# Altium PCB host_board.PcbDoc (part 3 of 3)
Units mm, origin at the board's own origin, x right, y up, seen from the top; angles counter-clockwise.
Board outline 82.44 x 55.58 mm, 4 copper layers (Top Layer, GND, Power, Bottom Layer), stack 1.594 mm thick; 220 components, 249 nets, 1076 pads, 228 vias.
Unrouted connection lines stored in the file: 688.
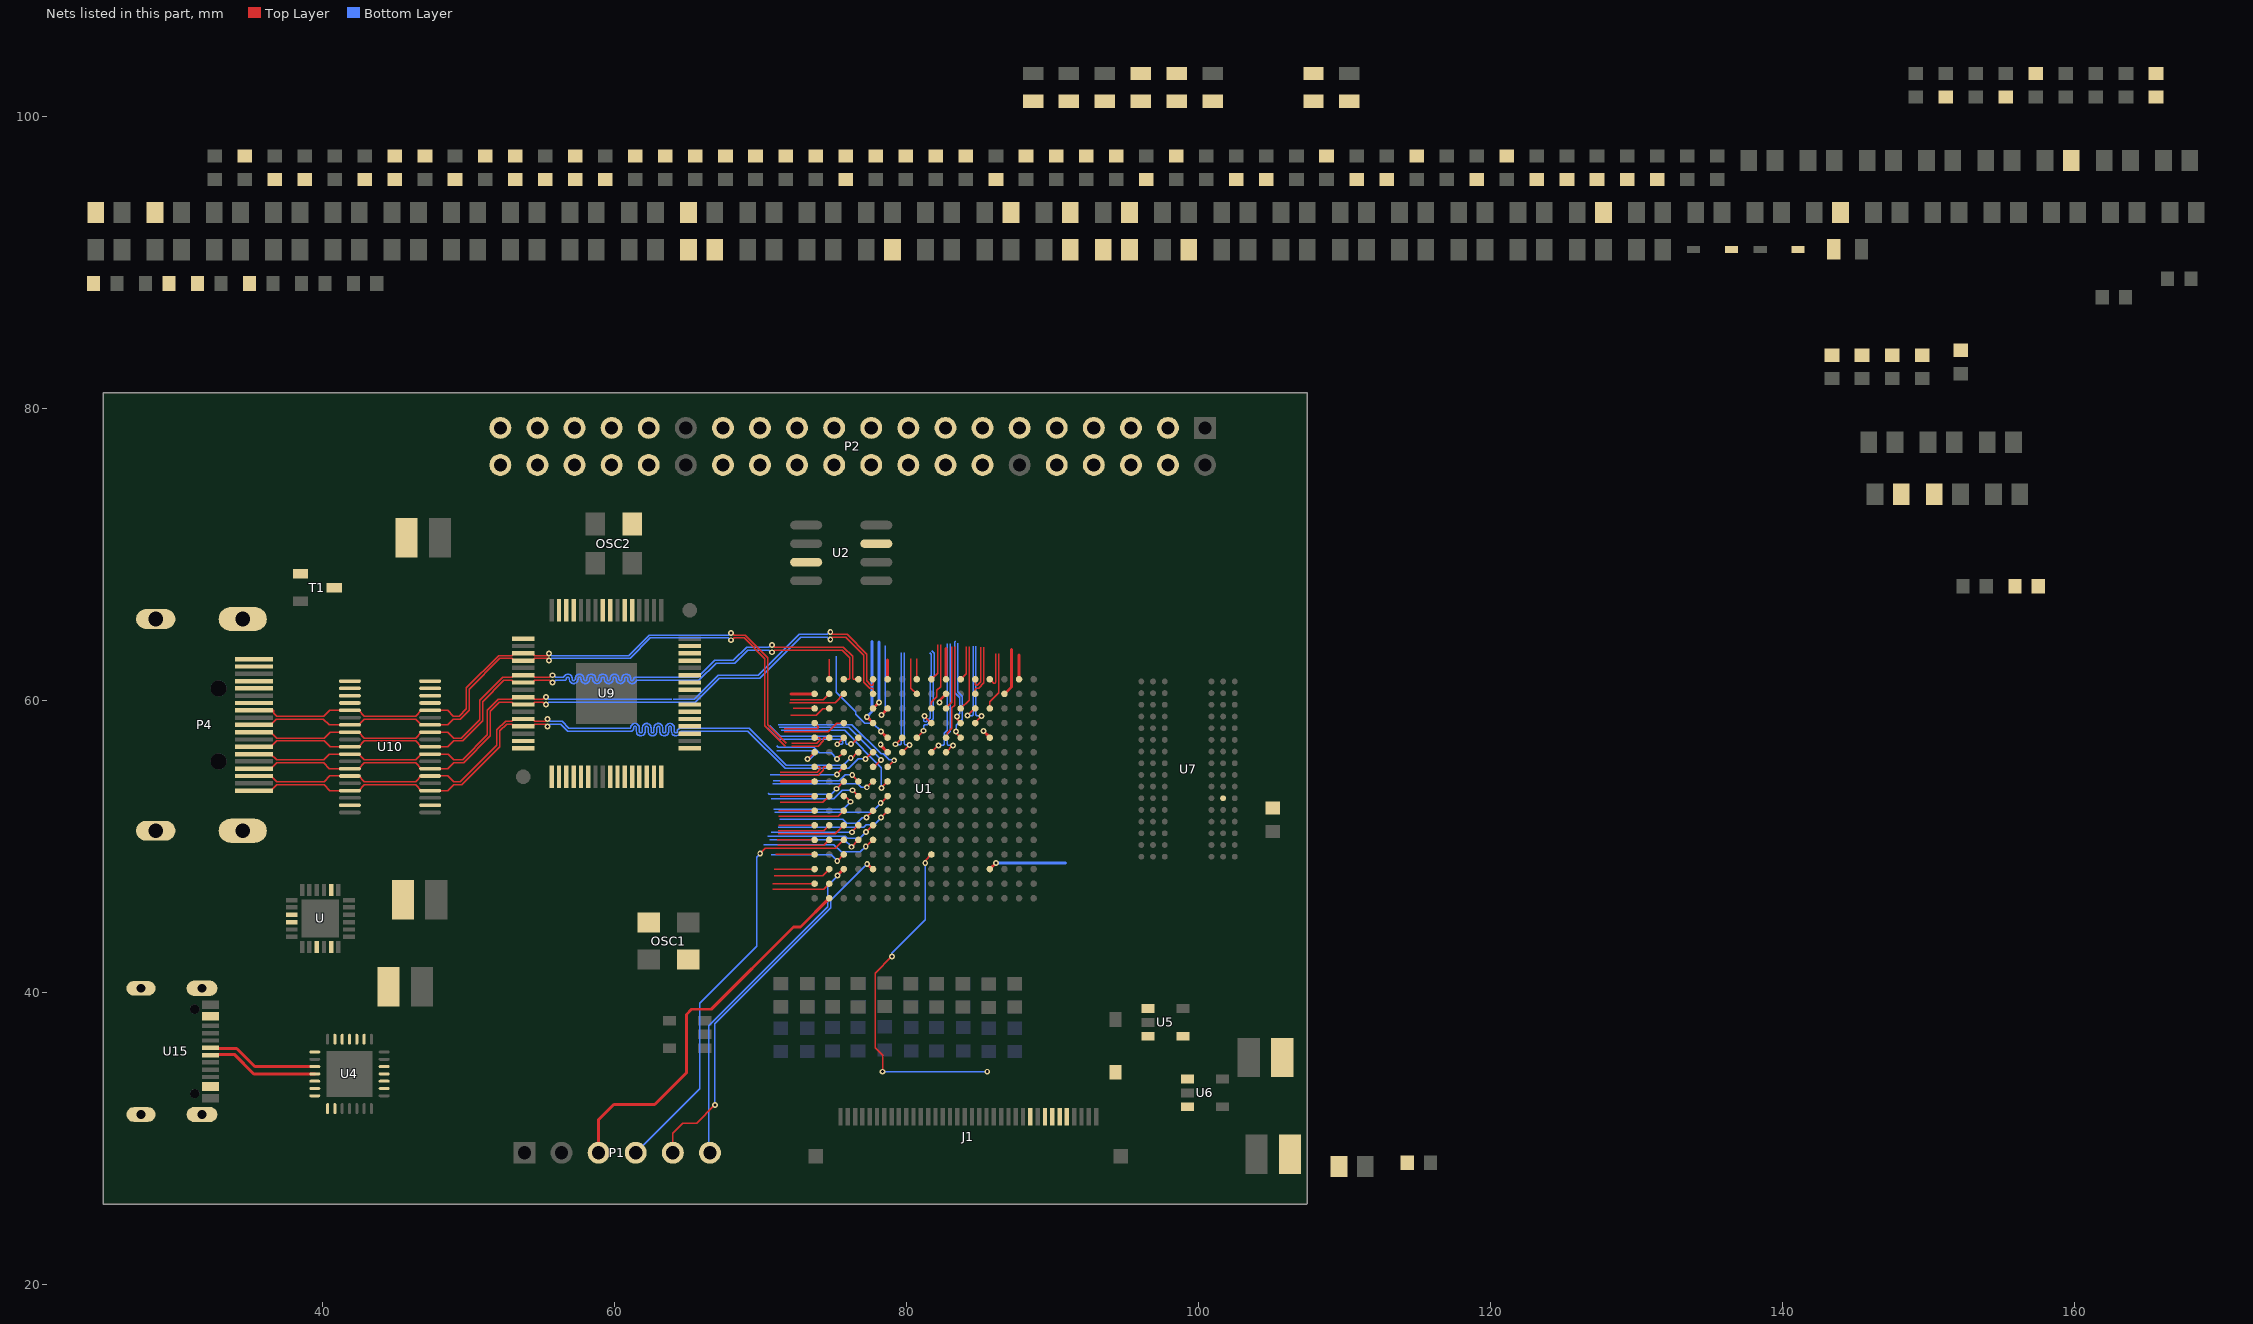
[diagram p5: the nets of this part, all layers, seen from the top]

## Via types
v1: diameter 0.4, hole 0.2, Top Layer to Bottom Layer, tented both sides, 219 vias
v2: diameter 0.5, hole 0.2, Top Layer to Bottom Layer, 9 vias

## Nets (pads, with @x,y where several pads share a name; then routed paths per layer and width w, separated by ;. In a path a pad name is that pad's centre, name@x,y a point inside that pad or via, vN(x,y) a via of type N, cw(c..) or ccw(c..) an arc to the next point about the centre after c; other vN are vias at no path point) (continued)
GPIO1_N: P2.4 U1.M10 | length 7.3
  Top Layer w0.1: v1@79.225,57 U1.M10@79.7,57.475
  Bottom Layer w0.1: v1(79.25,57.025) 79.275,57 79.566,57 79.625,57.059 79.625,63.3
GPIO1_P: P2.3 U1.L10 | length 7.4
  Top Layer w0.1: U1.L10@79.7,56.475 v1(80.2,56.975) v1@80.225,56.975
  Bottom Layer w0.1: 79.825,63.3 79.825,57.059 79.884,57 80.175,57 v1(80.2,56.975)
GPIO2_N: P2.6 U1.T9 | length 1.4
  Top Layer w0.1: U1.T9@80.7,61.475 80.7,62.875
GPIO2_P: P2.5 U1.R9 | length 2.6
  Top Layer w0.1: 80.3,62.875 80.3,60.875 U1.R9@80.7,60.475
GPIO3_N: P2.8 U1.N8 | length 6.1
  Top Layer w0.1: v1(81.225,58.95) U1.N8@81.7,58.475
  Bottom Layer w0.1: v1(81.225,58.95) 81.187,58.912 81.187,58.609 81.246,58.55 81.329,58.55 81.625,58.846 81.625,61.675 81.684,61.734 81.684,63.175 81.575,63.284
GPIO3_P: P2.7 U1.M9 | length 6.6
  Top Layer w0.1: U1.M9@80.7,57.475 v1@81.175,57.95
  Bottom Layer w0.1: v1(81.15,57.95) 81.187,57.987 81.187,58.291 81.246,58.35 81.412,58.35 81.825,58.763 81.825,61.592 81.884,61.651 81.884,63.258 81.716,63.425
GPIO4_N: P2.10 U1.T8 | length 2.5
  Top Layer w0.1: U1.T8@81.7,61.475 82.125,61.9 82.125,63.825
GPIO4_P: P2.9 U1.P8 | length 4.6
  Top Layer w0.1: U1.P8@81.7,59.475 81.7,59.91 82.075,60.285 82.075,60.725 82.325,60.975 82.325,63.825
GPIO5_N: P2.14 U1.M7 | length 6.5
  Top Layer w0.1: U1.M7@82.7,57.475 82.767,57.542 82.767,57.776 83.1,58.109 83.1,59.514 83.286,59.7 83.286,63.7
GPIO5_P: P2.13 U1.P7 | length 4.4
  Top Layer w0.1: U1.P7@82.7,59.475 82.7,59.512 83.075,59.888 83.075,63.7
GPIO6_N: P2.16 U1.T6 | length 2.4
  Top Layer w0.1: U1.T6@83.7,61.475 84.075,61.85 84.075,63.7
GPIO6_P: P2.15 U1.P6 | length 4.5
  Top Layer w0.1: U1.P6@83.7,59.475 84.275,60.05 84.275,63.7
GPIO7_N: P2.18 U1.T5 | length 3.2
  Top Layer w0.1: U1.T5@84.7,61.475 84.7,61.134 84.759,61.075 84.841,61.075 85.075,61.309 85.075,63.675
GPIO7_P: P2.17 U1.R5 | length 3.5
  Top Layer w0.1: U1.R5@84.7,60.475 84.7,60.816 84.759,60.875 84.924,60.875 85.275,61.226 85.275,63.675
GPIO8_N: P2.20 U1.P5 | length 5.9
  Top Layer w0.1: v1(84.175,59) 84.7,59.525 U1.P5@84.7,59.475
  Bottom Layer w0.1: v1(84.175,59) 84.2,58.975 84.491,58.975 84.55,59.034 84.55,63.725
GPIO8_P: P2.19 U1.N5 | length 5.8
  Top Layer w0.1: U1.N5@84.7,58.475 84.7,58.525 v1(85.125,58.95)
  Bottom Layer w0.1: 84.75,63.725 84.75,59.034 84.809,58.975 85.1,58.975 v1(85.125,58.95)
GPIO9_N: P2.22 U1.L7 | length 8.1
  Top Layer w0.1: U1.L7@82.7,56.475 v1(83.175,56.95)
  Bottom Layer w0.1: 82.975,63.9 82.975,57.9 82.775,57.7 82.775,57.009 82.834,56.95 v1(83.175,56.95)
GPIO9_P: P2.21 U1.L8 | length 8
  Top Layer w0.1: U1.L8@81.7,56.475 v1@82.15,56.925
  Bottom Layer w0.1: v1(82.175,56.95) 82.516,56.95 82.575,57.009 82.575,57.783 82.775,57.983 82.775,63.9
GPIO10_N: P2.24 U1.T4 | length 2.5
  Top Layer w0.1: U1.T4@85.7,61.475 85.975,61.2 86.058,61.2 86.116,61.259 86.116,63.209
GPIO10_P: P2.23 U1.P4 | length 4
  Top Layer w0.1: U1.P4@85.7,59.475 85.7,59.945 86.316,60.561 86.316,63.209
GPIO11_N: P2.26 U1.N6 | length 6
  Top Layer w0.1: v1(83.45,58.925) 83.45,58.755 83.7,58.505 U1.N6@83.7,58.475
  Bottom Layer w0.1: 83.359,64.091 83.299,64.032 83.299,60.551 83.625,60.225 83.625,59.245 83.625,59.134 83.45,58.959 v1(83.45,58.925)
GPIO11_P: P2.25 U1.M6 | length 6.8
  Top Layer w0.1: v1@83.386,57.789 U1.M6@83.7,57.475
  Bottom Layer w0.1: v1(83.386,57.9) 83.386,58.309 83.825,58.748 83.825,59.328 83.825,60.308 83.499,60.634 83.499,63.949
GPIO12_N: P2.28 U1.K16 | length 3.3
  Top Layer w0.1: 71.358,55.1 73.866,55.1 74.1,55.334 74.1,55.416 74.041,55.475 U1.K16@73.7,55.475
GPIO12_P: P2.27 U1.K15 | length 3.7
  Top Layer w0.1: 71.358,54.9 73.949,54.9 74.3,55.251 74.3,55.416 74.359,55.475 U1.K15@74.7,55.475
GPIO13_N: P2.32 U1.N16 | length 2.8
  Top Layer w0.1: 71.616,58.084 73.891,58.084 73.95,58.142 73.95,58.225 U1.N16@73.7,58.475
GPIO13_P: P2.31 U1.N14 | length 4.3
  Top Layer w0.1: 71.616,57.884 74.639,57.884 75.23,58.475 U1.N14@75.7,58.475
GPIO14_N: P2.34 U1.M16 | length 2.6
  Top Layer w0.1: 72.15,57.084 73.85,57.084 74.1,57.334 74.1,57.416 74.041,57.475 U1.M16@73.7,57.475
GPIO14_P: P2.33 U1.M15 | length 2.9
  Top Layer w0.1: 72.15,56.884 73.933,56.884 74.3,57.251 74.3,57.416 74.359,57.475 U1.M15@74.7,57.475
GPIO15_N: P2.36 U1.L16 | length 4
  Top Layer w0.1: v1@73.25,56.025 U1.L16@73.7,56.475
  Bottom Layer w0.1: 71.117,56.575 73.592,56.575 73.7,56.467 73.7,56.325 73.4,56.025 v1(73.225,56.025)
GPIO15_P: P2.35 U1.L14 | length 5.2
  Top Layer w0.1: v1(75.23,56.025) 75.68,56.475 U1.L14@75.7,56.475
  Bottom Layer w0.1: 71.1,56.925 71.2,56.825 73.625,56.825 74.025,56.425 74.83,56.425 v1(75.23,56.025)
GPIO_31: P2.37 U1.P15 | length 2.8
  Top Layer w0.1: 72.075,59 73.8,59 74.25,59.45 74.7,59.45 U1.P15@74.7,59.475
GPIO_32: P2.38 U1.J16 | length 2.3
  Top Layer w0.2: 71.4,54.475 U1.J16@73.7,54.475
GPIO_33: P2.39 U1.P11 | length 5.5
  Top Layer w0.2: v1(78.275,59.025) 78.7,59.45 U1.P11@78.7,59.475
  Bottom Layer w0.1: v1(78.275,59.025) 78.525,59.275 78.525,63.775
GPIO_34: P2.40 U1.M11 | length 7.4
  Top Layer w0.2: v1(78.25,57.9) 78.675,57.475 U1.M11@78.7,57.475
  Bottom Layer w0.1: 75.175,63.05 75.175,60.595 76.525,59.245 76.525,59.075 77.125,58.475 77.675,58.475 v1(78.25,57.9)
HDMI_5V: C63.2 C73.2 P4.18 R59.1 R61.2
HDMI_CEC: P4.13 R55.1 U10.23
HDMI_CEC_LV: R52.1 R57.2 R73.2 U10.16
HDMI_CFG_SCL: U1.K12 U9.53 | length 8.6
  Top Layer w0.1: U1.K12@77.7,55.475 77.775,55.475 v1(78.25,55.95)
  Bottom Layer w0.1: 71.275,58.175 76.025,58.175 v1(78.25,55.95)
HDMI_CFG_SDA: U1.K14 U9.54 | length 5.2
  Top Layer w0.1: v1@75.275,55.05 U1.K14@75.7,55.475
  Bottom Layer w0.1: 70.65,54.95 v1(75.23,54.95)
HDMI_D0: U1.H14 U9.43 | length 6.2
  Top Layer w0.1: U1.H14@75.7,53.475 75.7,53.55 v1(76.165,53.085)
  Bottom Layer w0.1: 70.892,52.575 75.655,52.575 v1(76.165,53.085)
HDMI_D1: U1.H13 U9.42 | length 6.4
  Top Layer w0.1: v1(76.3,53.875) U1.H13@76.7,53.475
  Bottom Layer w0.1: 70.725,53.3 75.025,53.3 75.6,53.875 v1(76.3,53.875)
HDMI_D2: U1.H11 U9.41 | length 8.2
  Top Layer w0.1: v1(78.225,53) U1.H11@78.7,53.475
  Bottom Layer w0.1: 70.975,52.375 77.6,52.375 v1(78.225,53)
HDMI_D3: U1.G12 U9.39 | length 6.9
  Top Layer w0.1: v1@77.25,52.025 U1.G12@77.7,52.475
  Bottom Layer w0.1: 71.3,51.9 75.625,51.9 75.9,51.625 76.575,51.625 76.95,52 v1(77.25,52)
HDMI_D4: U1.H16 U9.38 | length 2.3
  Top Layer w0.1: 71.35,53.475 U1.H16@73.7,53.475
HDMI_D5: U1.H15 U9.37 | length 3.5
  Top Layer w0.1: 71.342,53.042 74.267,53.042 U1.H15@74.7,53.475
HDMI_D6: U1.G16 U9.36 | length 2.4
  Top Layer w0.1: 71.25,52.475 U1.G16@73.7,52.475
HDMI_D7: U1.G14 U9.35 | length 4.6
  Top Layer w0.1: 71.25,52.1 75.325,52.1 U1.G14@75.7,52.475
HDMI_D8: U1.F16 U9.33 | length 2.4
  Top Layer w0.1: 71.25,51.475 U1.F16@73.7,51.475
HDMI_D9: U1.F15 U9.32 | length 3.6
  Top Layer w0.1: 71.225,51.1 74.325,51.1 U1.F15@74.7,51.475
HDMI_D10: U1.E16 U9.31 | length 2.5
  Top Layer w0.1: 71.15,50.475 U1.E16@73.7,50.475
HDMI_D11: U1.E15 U9.30 | length 3.7
  Top Layer w0.1: 71.175,50.1 74.325,50.1 U1.E15@74.7,50.475
HDMI_D12: U1.C16 U9.29 | length 2.8
  Top Layer w0.1: 70.922,48.475 U1.C16@73.7,48.475
HDMI_D13: U1.C15 U9.28 | length 4
  Top Layer w0.1: 70.925,48.025 74.25,48.025 U1.C15@74.7,48.475
HDMI_D14: U1.F14 U9.27 | length 4.7
  Top Layer w0.1: 71.2,50.9 75.125,50.9 U1.F14@75.7,51.475
HDMI_D15: U1.F13 U9.26 | length 6.2
  Top Layer w0.1: v1(76.25,51) 76.25,51.025 U1.F13@76.7,51.475
  Bottom Layer w0.1: 70.725,51 v1(76.25,51)
HDMI_D16: U1.D16 U9.22 | length 2.6
  Top Layer w0.1: 71.05,49.475 U1.D16@73.7,49.475
HDMI_D17: U1.D14 U9.21 | length 5.4
  Top Layer w0.1: v1@75.25,49 v1(75.25,49.025) U1.D14@75.7,49.475
  Bottom Layer w0.1: 70.725,49.45 74.825,49.45 75.234,49.041 75.234,49.025 v1(75.25,49.025)
HDMI_D18: U1.G11 U9.20 | length 8
  Top Layer w0.1: v1@78.25,52.025 U1.G11@78.7,52.475
  Bottom Layer w0.1: 71.2,51.35 77.056,51.35 77.231,51.525 77.775,51.525 v1(78.25,52)
HDMI_D19: U1.F12 U9.19 | length 7.6
  Top Layer w0.1: v1(77.226,51.025) 77.676,51.475 U1.F12@77.7,51.475
  Bottom Layer w0.1: 70.5,50.725 75.794,50.725 75.944,50.575 76.776,50.575 v1(77.226,51.025)
HDMI_D20: U1.B16 U9.18 | length 2.9
  Top Layer w0.1: 70.834,47.475 U1.B16@73.7,47.475
HDMI_D21: U1.B15 U9.17 | length 4
  Top Layer w0.1: 70.834,47.1 74.325,47.1 U1.B15@74.7,47.475
HDMI_D22: U1.E12 U9.16 | length 8
  Top Layer w0.1: v1(77.201,50.011) 77.665,50.475 U1.E12@77.7,50.475
  Bottom Layer w0.1: 70.209,50.159 75.026,50.159 75.534,49.65 76.84,49.65 v1(77.201,50.011)
HDMI_D23: U1.E13 U9.15 | length 6.5
  Top Layer w0.1: v1@76.236,50.011 U1.E13@76.7,50.475
  Bottom Layer w0.1: 70.625,50.5 75.736,50.5 v1(76.236,50)
HDMI_DE: U1.J13 U9.45 | length 6.1
  Top Layer w0.1: v1@76.3,54.875 U1.J13@76.7,54.475
  Bottom Layer w0.1: 70.875,54.525 75.4,54.525 75.8,54.925 v1(76.281,54.925)
HDMI_HPD: P4.19 R59.2 T1.3 U10.20
HDMI_HPD_LV: R53.1 U9.1 U10.19
HDMI_HS: U1.J12 U9.46 | length 7.1
  Top Layer w0.1: v1(77.275,54.075) 77.675,54.475 U1.J12@77.7,54.475
  Bottom Layer w0.1: 70.825,54.325 76.65,54.325 76.9,54.075 v1(77.275,54.075)
HDMI_LCC: U1.J14 U9.25 | length 5.6
  Top Layer w0.1: v1(75.2,53.975) U1.J14@75.7,54.475 75.7,54.5 U1.J14@75.675,54.5
  Bottom Layer w0.1: 70.525,53.675 70.6,53.6 74.825,53.6 v1(75.2,53.975)
HDMI_RST_N: U1.K11 U9.56 | length 9.6
  Top Layer w0.1: U1.K11@78.7,55.475 v1(79.15,55.925)
  Bottom Layer w0.1: 71.2,58.375 76.25,58.375 78.25,56.375 78.4,56.375 78.8,55.975 79.1,55.975 v1(79.15,55.925)
HDMI_SCL: P4.15 R54.1 U10.22
HDMI_SCL_LV: R51.1 R71.1 U1.R15 U9.62 U10.17 | length 2.8
  Top Layer w0.1: 72.025,60.075 74.3,60.075 U1.R15@74.7,60.475
HDMI_SDA: P4.16 R56.1 U10.21
HDMI_SDA_LV: R50.1 R72.1 U1.P16 U9.63 U10.18 | length 1.4
  Top Layer w0.1: 72.25,59.475 U1.P16@73.7,59.475
HDMI_VS: U1.J11 U9.47 | length 10
  Top Layer w0.1: v1(78.275,54.025) 78.275,54.05 U1.J11@78.7,54.475
  Bottom Layer w0.1: 71.4,57.975 75.77,57.975 77.046,56.699 77.046,56.659 78.275,55.43 v1(78.275,54.025)
HDP_EN: R70.2 T1.1 U1.R14 | length 3.9
  Top Layer w0.1: 72,59.875 75.1,59.875 U1.R14@75.7,60.475
HPD_NOTIF: R61.1 R62.2 U1.T15 | length 1.4
  Top Layer w0.1: U1.T15@74.7,61.475 74.7,62.85
LCD_BL_A: C29.2 D7.1 J1.31
LCD_BL_FB: J1.32 R27.2 U6.3
LCD_BOOST_FB: C36.1 J1.30 R14.1 R28.2 U5.3
LCD_MVDRV: C32.2 J1.29
LCD_PVDRV: C35.2 C36.2 J1.27 R14.2
LCD_PWREN: R29.2 U1.D8 U5.4 | length 23.9
  Top Layer w0.1: v1(78.35,34.6) 78.35,35.725 77.85,36.225 77.85,41.35 v1(79,42.5) ; v1(81.275,48.9) 81.275,49.05 U1.D8@81.7,49.475
  Bottom Layer w0.1: v1(78.35,34.6) v1(85.525,34.6) ; v1(79,42.5) 79,42.717 81.275,44.992 v1(81.275,48.9)
LDO1_FB: R18.2 R19.1 U.21
LDO2_FB: R20.2 R21.1 U.22
NetC14_2: C14.2 U4.5
NetC15_2: C15.2 U4.6
NetC16_1: C16.1 P4.S1 P4.S2 P4.S3 P4.S4 R17.1
NetC33_1: C33.1 L3.2 U5.1
NetC33_2: C33.2
NetC47_1: C47.1 C48.1 C49.1
NetC62_2: C62.2 U10.37
NetC64_2: C64.2 R58.1 U10.2
NetC66_2: C66.2 L5.1 U9.57
NetC?_1: C?.1@109.605,28.101 R?.1 U15.G1 U15.G2 U15.G3 U15.G4
NetD1_2: D1.2 U4.7 U4.8 U15.A4/B9 U15.B4/A9
NetD3_1: L4.2 U6.1
NetD8_2: D8.2 P2.11
NetL1_1: L1.1 U.5
NetL2_1: L2.1 U.14
NetLD1_1: LD1.1 R42.2
NetLD2_1: LD2.1 R75.2
NetLD3_1: LD3.1 R76.2
NetLD4_1: LD4.1 R77.2
NetLD5_1: LD5.1 R78.2
NetLD6_1: LD6.1 R79.2
NetLD7_1: LD7.1 R80.2
NetLD8_1: LD8.1 R81.2
NetLD9_1: LD9.1 R82.2
NetOSC1_1: OSC1.1 R35.1
NetOSC2_1: OSC2.1 R74.1
NetR13_1: R13.1 U1.M4 | length 0.6
  Top Layer w0.2: v1(85.275,57.925) 85.7,57.5 U1.M4@85.7,57.475
NetR15_2: R15.2 U4.9
NetR16_1: R16.1 U4.1
NetR24_1: R24.1 U.3
NetR31_2: R31.2 U7.L8
NetR32_1: R32.1 R33.2 U1.T7 | length 2.1
  Top Layer w0.2: U1.T7@82.7,61.475 82.7,63.575
NetR34_2: R34.2 U1.T2 | length 1.7
  Top Layer w0.2: U1.T2@87.7,61.475 87.7,63.125
NetR36_2: R36.2 U1.L11 | length 0.7
  Top Layer w0.2: v1@78.225,56.975 78.225,56.95 U1.L11@78.7,56.475
  other v1: 78.225,57
NetR43_1: R43.1 U2.3 U2.7
NetR45_1: R45.1 U1.T11 | length 1.3
  Top Layer w0.2: U1.T11@78.7,61.475 78.7,62.8
NetR46_1: R46.1 U1.R3 | length 3.2
  Top Layer w0.2: U1.R3@86.7,60.475 87.175,60.95 87.175,63.5
NetR49_1: R49.1 U1.C4 | length 5.4
  Top Layer w0.2: U1.C4@85.7,48.475 v1@86.15,48.925
  Bottom Layer w0.2: v1(86.116,48.9) 90.875,48.9
NetR57_1: R57.1 U1.R16 | length 1.6
  Top Layer w0.2: 72.075,60.475 U1.R16@73.7,60.475
NetR73_1: R73.1 U9.61
NetU4_26: U4.26 U4.27
RST_CPU: R39.2 U4.23
SYS_CLK: OSC1.3 R32.2
TCK: P1.6 R37.1 U1.C14 U4.17 | length 23.3
  Top Layer w0.2: v1(75.275,48.025) 75.275,48.05 U1.C14@75.7,48.475
  Bottom Layer w0.1: P1.6@66.53,29.05 66.45,29.13 66.45,37.75 74.6,45.9 74.6,47.35 v1(75.275,48.025)
TDI: P1.5 U1.C12 U4.18 | length 26.4
  Top Layer w0.1: P1.5@63.99,29.05 63.99,30.39 64.675,31.075 65.625,31.075 v1(66.875,32.325)
  Top Layer w0.2: v1(77.3,48.825) 77.65,48.475 U1.C12@77.7,48.475
  Bottom Layer w0.1: v1(66.875,32.325) 66.875,37.892 74.8,45.817 74.8,46.325 v1(77.3,48.825)
TDO: P1.4 U1.E14 U4.19 | length 30.2
  Top Layer w0.1: v1(69.975,49.55) 70.325,49.9 75.125,49.9 U1.E14@75.7,50.475
  Bottom Layer w0.1: P1.4@61.45,29.05 61.45,29.15 61.55,29.15 65.825,33.425 65.825,39.275 69.725,43.175 69.725,49.3 v1(69.975,49.55)
TMDS0_N: P4.9 R63.2 U1.T13 U9.6 U10.12 U10.27 | length 51
  Top Layer w0.1: P4.9@35.3,57.85 36.462,57.85 36.862,57.45 40.13,57.45 40.53,57.85 U10.27@41.875,57.85 42.473,57.85 42.873,57.45 46.377,57.45 46.777,57.85 U10.12@47.375,57.85 48.595,57.85 48.995,57.45 49.187,57.45 49.508,57.45 50.775,58.717 50.775,60.029 52.347,61.601 52.513,61.601 ; 52.513,61.6 52.975,61.6 53.125,61.75 U9.6@53.75,61.75 54.375,61.75 54.525,61.6 54.758,61.6 55.541,61.6 55.691,61.75 v1(55.75,61.75) ; v1(70.775,63.825) 70.834,63.825 70.984,63.675 73.39,63.675 74.875,63.675 75.666,63.675 76.3,63.041 76.3,61.534 76.359,61.475 U1.T13@76.7,61.475
  Bottom Layer w0.1: v1(55.75,61.75) 55.831,61.75 55.981,61.6 56.51,61.6 cw(c56.8,61.523) 57.1,61.523 57.1,61.477 ccw(c57.2,61.477) 57.3,61.477 57.3,61.523 cw(c57.6,61.523) 57.9,61.523 57.9,61.477 ccw(c58,61.477) 58.1,61.477 58.1,61.523 cw(c58.4,61.523) 58.7,61.523 58.7,61.477 ccw(c58.8,61.477) 58.9,61.477 58.9,61.523 cw(c59.2,61.523) 59.5,61.523 59.5,61.477 ccw(c59.6,61.477) 59.7,61.477 59.7,61.523 cw(c60,61.523) 60.3,61.523 60.3,61.477 ccw(c60.4,61.477) 60.5,61.477 60.5,61.523 cw(c60.8,61.523) 61.1,61.523 61.1,61.477 ccw(c61.2,61.477) 61.3,61.477 cw(c61.423,61.477) 61.423,61.6 65.7,61.6 66.866,62.766 68.134,62.766 69.042,63.675 70.566,63.675 70.716,63.825 v1(70.775,63.825)
TMDS0_P: P4.7 R60.2 U1.T14 U9.7 U10.10 U10.29 | length 50.7
  Top Layer w0.1: P4.7@35.3,56.85 36.467,56.85 36.867,57.25 40.13,57.25 40.53,56.85 U10.29@41.875,56.85 42.473,56.85 42.873,57.25 46.377,57.25 46.777,56.85 U10.10@47.375,56.85 48.595,56.85 48.995,57.25 49.27,57.25 49.591,57.25 50.975,58.634 50.975,59.946 52.43,61.401 ; 52.43,61.4 52.975,61.4 53.125,61.25 U9.7@53.75,61.25 54.375,61.25 54.525,61.4 54.675,61.4 55.541,61.4 55.691,61.25 v1(55.75,61.25) ; v1(70.775,63.325) 70.834,63.325 70.984,63.475 73.79,63.475 74.958,63.475 75.583,63.475 76.1,62.958 76.1,61.534 76.041,61.475 U1.T14@75.7,61.475
  Bottom Layer w0.1: v1(55.75,61.25) 55.831,61.25 55.981,61.4 56.577,61.4 ccw(c56.577,61.523) 56.7,61.523 cw(c56.8,61.523) 56.9,61.523 56.9,61.477 ccw(c57.2,61.477) 57.5,61.477 57.5,61.523 cw(c57.6,61.523) 57.7,61.523 57.7,61.477 ccw(c58,61.477) 58.3,61.477 58.3,61.523 cw(c58.4,61.523) 58.5,61.523 58.5,61.477 ccw(c58.8,61.477) 59.1,61.477 59.1,61.523 cw(c59.2,61.523) 59.3,61.523 59.3,61.477 ccw(c59.6,61.477) 59.9,61.477 59.9,61.523 cw(c60,61.523) 60.1,61.523 60.1,61.477 ccw(c60.4,61.477) 60.7,61.477 60.7,61.523 cw(c60.8,61.523) 60.9,61.523 60.9,61.477 ccw(c61.2,61.477) 61.49,61.4 65.783,61.4 66.949,62.566 68.216,62.566 69.125,63.475 70.566,63.475 70.716,63.325 v1(70.775,63.325)
TMDS1_N: P4.6 R65.2 U1.T12 U9.9 U10.9 U10.30 | length 50.9
  Top Layer w0.1: P4.6@35.3,56.35 36.462,56.35 36.862,55.95 36.959,55.95 38.787,55.95 40.08,55.95 40.48,56.35 U10.30@41.875,56.35 42.473,56.35 42.873,55.95 46.377,55.95 46.777,56.35 U10.9@47.375,56.35 48.62,56.35 49.005,55.965 49.59,55.965 51.3,57.675 51.3,59.366 52.034,60.1 52.975,60.1 53.125,60.25 U9.9@53.75,60.25 54.375,60.25 54.525,60.1 55.091,60.1 55.241,60.25 v1(55.3,60.25) ; v1(74.775,64.7) 74.792,64.7 74.942,64.55 75.925,64.55 77.275,63.2 77.275,61.359 77.559,61.075 77.641,61.075 77.7,61.134 U1.T12@77.7,61.475
  Bottom Layer w0.1: v1(55.3,60.25) 55.359,60.25 55.509,60.1 63.925,60.1 ; 64.008,60.1 65.442,60.1 67.092,61.75 69.857,61.75 72.657,64.55 74.566,64.55 74.716,64.7 v1(74.775,64.7)
TMDS1_P: P4.4 R64.2 U1.R12 U9.10 U10.7 U10.32 | length 51
  Top Layer w0.1: P4.4@35.3,55.35 36.462,55.35 36.862,55.75 37.041,55.75 38.705,55.75 40.08,55.75 40.48,55.35 U10.32@41.875,55.35 42.473,55.35 42.873,55.75 46.377,55.75 46.777,55.35 U10.7@47.375,55.35 48.57,55.35 48.985,55.765 49.672,55.765 51.5,57.592 51.5,59.283 52.117,59.9 52.975,59.9 53.125,59.75 U9.10@53.75,59.75 54.375,59.75 54.525,59.9 55.091,59.9 55.241,59.75 v1(55.3,59.75) ; v1(74.775,64.2) 74.792,64.2 74.942,64.35 75.842,64.35 77.075,63.117 77.075,61.276 77.476,60.875 77.641,60.875 77.7,60.816 U1.R12@77.7,60.475
  Bottom Layer w0.1: v1(55.3,59.75) 55.359,59.75 55.509,59.9 65.525,59.9 67.175,61.55 69.94,61.55 72.74,64.35 74.566,64.35 74.716,64.2 v1(74.775,64.2)
TMDS2_N: P4.3 R67.2 U1.L13 U9.12 U10.6 U10.33 | length 50.1
  Top Layer w0.1: P4.3@35.3,54.85 36.462,54.85 36.862,54.45 38.433,54.45 40.105,54.45 40.505,54.85 U10.33@41.875,54.85 42.473,54.85 42.873,54.45 46.377,54.45 46.777,54.85 U10.6@47.375,54.85 48.595,54.85 48.995,54.45 49.45,54.45 51.95,56.95 51.95,58.016 52.534,58.6 52.975,58.6 53.125,58.75 U9.12@53.75,58.75 54.375,58.75 54.525,58.6 55.25,58.6 v1(55.4,58.75) ; v1(76.175,56.075) 76.238,56.075 76.637,56.475 U1.L13@76.7,56.475
  Bottom Layer w0.1: v1(55.4,58.75) 55.459,58.75 55.609,58.6 56.405,58.6 56.88,58.125 61.1,58.125 ; 61.1,58.148 cw(c61.4,58.148) 61.7,58.148 61.7,57.902 ccw(c61.8,57.902) 61.9,57.902 61.9,58.148 cw(c62.2,58.148) 62.5,58.148 62.5,57.902 ccw(c62.6,57.902) 62.7,57.902 62.7,58.148 cw(c63,58.148) 63.3,58.148 63.3,57.902 ccw(c63.4,57.902) 63.5,57.902 63.5,58.148 cw(c63.8,58.148) 64.1,58.148 64.1,57.902 ccw(c64.2,57.902) 64.3,57.902 cw(c64.523,57.902) 64.523,58.125 69.208,58.125 71.758,55.575 75.65,55.575 76.15,56.075 v1(76.175,56.075)
TMDS2_P: P4.1 R66.2 U1.L12 U9.13 U10.4 U10.35 | length 51.2
  Top Layer w0.1: P4.1@35.3,53.85 36.462,53.85 36.862,54.25 38.35,54.25 40.105,54.25 40.505,53.85 U10.35@41.875,53.85 42.473,53.85 42.873,54.25 46.377,54.25 46.777,53.85 U10.4@47.375,53.85 48.595,53.85 48.995,54.25 49.533,54.25 52.15,56.867 52.15,57.933 52.617,58.4 52.975,58.4 53.125,58.25 U9.13@53.75,58.25 54.375,58.25 54.525,58.4 55.25,58.4 v1(55.4,58.25) ; v1(77.175,56.025) 77.213,56.025 77.662,56.475 U1.L12@77.7,56.475
  Bottom Layer w0.1: v1(55.4,58.25) 55.459,58.25 55.609,58.4 56.322,58.4 56.797,57.925 61.15,57.925 ccw(c61.15,58.075) 61.3,58.075 61.3,58.148 cw(c61.4,58.148) 61.5,58.148 61.5,57.902 ccw(c61.8,57.902) 62.1,57.902 62.1,58.148 cw(c62.2,58.148) 62.3,58.148 62.3,57.902 ccw(c62.6,57.902) 62.9,57.902 62.9,58.148 cw(c63,58.148) 63.1,58.148 63.1,57.902 ccw(c63.4,57.902) 63.7,57.902 63.7,58.148 cw(c63.8,58.148) 63.9,58.148 63.9,57.902 ccw(c64.2,57.902) 64.5,57.902 ; 64.523,57.925 69.125,57.925 71.675,55.375 76.05,55.375 76.7,56.025 v1(77.175,56.025)
TMDS_CLK_N: P4.12 R69.2 U1.M14 U9.3 U10.15 U10.24 | length 53.4
  Top Layer w0.1: P4.12@35.3,59.35 36.662,59.35 36.662,59.15 36.877,58.935 40.09,58.935 40.505,59.35 U10.24@41.875,59.35 42.473,59.35 42.873,58.95 46.377,58.95 46.777,59.35 U10.15@47.375,59.35 48.57,59.35 48.97,58.95 49.358,58.95 49.85,59.442 49.85,60.883 52.067,63.1 52.975,63.1 53.125,63.25 U9.3@53.75,63.25 54.375,63.25 54.525,63.1 55.5,63.1 55.509,63.109 v1(55.509,63.25) ; v1(67.975,64.65) 68.034,64.65 68.184,64.5 68.958,64.5 70.5,62.958 70.5,58.375 71.775,57.1 ; v1(75.25,57.025) U1.M14@75.7,57.475
  Bottom Layer w0.1: v1(55.509,63.25) 55.567,63.25 55.717,63.1 60.977,63.1 62.377,64.5 67.783,64.5 67.933,64.65 v1(67.975,64.65) ; 70.484,58.134 71.251,57.366 74.088,57.366 74.097,57.375 75.429,57.375 75.625,57.179 75.625,57.096 75.566,57.037 75.262,57.037 v1(75.25,57.025)
TMDS_CLK_P: P4.10 R68.2 U1.M13 U9.4 U10.13 U10.26 | length 53.4
  Top Layer w0.1: P4.10@35.3,58.35 36.462,58.35 36.847,58.735 40.07,58.735 40.455,58.35 U10.26@41.875,58.35 42.473,58.35 42.873,58.75 46.377,58.75 46.777,58.35 U10.13@47.375,58.35 48.57,58.35 48.97,58.75 49.441,58.75 50.05,59.359 50.05,60.8 52.15,62.9 52.975,62.9 53.125,62.75 U9.4@53.75,62.75 54.375,62.75 54.525,62.9 55.5,62.9 55.509,62.891 v1(55.509,62.75) ; v1(67.975,64.15) 68.034,64.15 68.184,64.3 68.875,64.3 70.3,62.875 70.3,58.292 71.692,56.9 ; v1(76.2,57.05) 76.275,57.05 U1.M13@76.7,57.475
  Bottom Layer w0.1: v1(55.509,62.75) 55.567,62.75 55.717,62.9 61.06,62.9 62.46,64.3 67.783,64.3 67.933,64.15 v1(67.975,64.15) ; 70.625,58.275 71.334,57.566 74.005,57.566 74.014,57.575 75.512,57.575 75.825,57.262 75.825,57.096 75.884,57.037 76.187,57.037 v1(76.2,57.05)
TMS: P1.3 U1.A15 U4.16 | length 26.7
  Top Layer w0.2: P1.3@58.91,29.05 58.91,31.31 59.95,32.35 62.75,32.35 64.925,34.525 64.925,38.525 65.275,38.875 66.625,38.875 72.262,44.512 72.738,44.512 U1.A15@74.7,46.475
UART_RX: LD9.2 U1.N12 U4.24 | length 5.9
  Top Layer w0.2: v1(77.275,58.9) U1.N12@77.7,58.475
  Bottom Layer w0.2: v1(77.275,58.9) 77.275,58.907 77.625,59.257 77.625,64.05
UART_TX: LD8.2 U1.P12 U4.25 | length 4.7
  Top Layer w0.2: U1.P12@77.7,59.475 v1(78.1,59.875)
  Bottom Layer w0.2: v1(78.1,59.875) 78.1,64.025
USB_N: U4.4 U15.A7 | length 7.7
  Top Layer w0.2: U15.A7@32.325,35.74 32.375,35.79 33.96,35.79 35.3,34.45 U4.4@39.475,34.45
USB_P: U4.3 U15.A6 | length 7.7
  Top Layer w0.2: U15.A6@32.325,36.24 32.375,36.19 34.126,36.19 35.366,34.95 U4.3@39.475,34.95
USER_LED: LD2.2 U1.R7 | length 0.8
  Top Layer w0.2: v1(82.252,59.888) 82.252,60.027 U1.R7@82.7,60.475
pads on no net: P2.29 P4. P4.14 U1.A4 U1.A12 U1.A13 U1.A14 U1.B3 U1.B5 U1.B12 U1.B14 U1.C13 U1.D9 U1.E11 U1.F10 U1.M5 U1.M12 U1.N4 U4.10 U4.11 U4.12 U4.13 U4.14 U4.15 U4.20 U4.21 U4.22 U4.28 U7.J1 U7.J9 U7.L1 U7.L9 U7.M7 U8.5 U9.48 U9.49 U9.50 U9.51 U9.55 U9.59 U9.64 U9.FTG1 U9.FTG2 U10.38 U15. U15.A5 U15.A8 U15.B5 U15.B6 U15.B7 U15.B8
copper on no net: | length 76.8
  Top Layer w0.254: 25.5,22.304 25.5,21.796 ; 27.023,22.561 25.5,22.05 ; 27.025,21.545 25.5,22.05 ; 60.177,22.113 25.5,22.05 ; 72.923,22.137 107.6,22.2 ; 106.075,22.705 107.6,22.2 ; 106.077,21.689 107.6,22.2 ; 107.6,22.454 107.6,21.946

## Polygon pours and split planes (outlines as drawn)
no net on GND (split plane): 106.928,26.034 25.51,26.034 25.51,80.59 106.928,80.59
no net on Power (split plane): 106.928,26.034 25.51,26.034 25.51,80.59 106.928,80.59

## Other copper
Top Layer:
  text "82.1 (mm)" at 60.432,21.2 h1.52 r0.1

## Dimensions
14.2,80.8 to 18.584,25.524 on Top Layer

## Text inside footprints (layer, text, board x,y; h text height)
P2: Top Overlay "1" at 102.98,79.198 h1.27 r180; Top Overlay "2" at 102.98,76.658 h1.27 r180; Top Overlay "40" at 50.148,76.658 h1.27 r180; Top Overlay "39" at 50.148,79.198 h1.27 r180
U15: Mechanical 13 "PCB EDGE" at 25.07,30.59 h0.41 r270